# Altium PCB PortSwitcher1D.PCBDOC (part 2 of 4)
Units mil, origin at the board's own origin, x right, y up, seen from the top; angles counter-clockwise.
Board outline 6005.03 x 6005.03 mil, 4 copper layers (Top Layer, InternalPlane1, InternalPlane2, Bottom Layer); 153 components, 325 nets, 1175 pads, 173 vias.
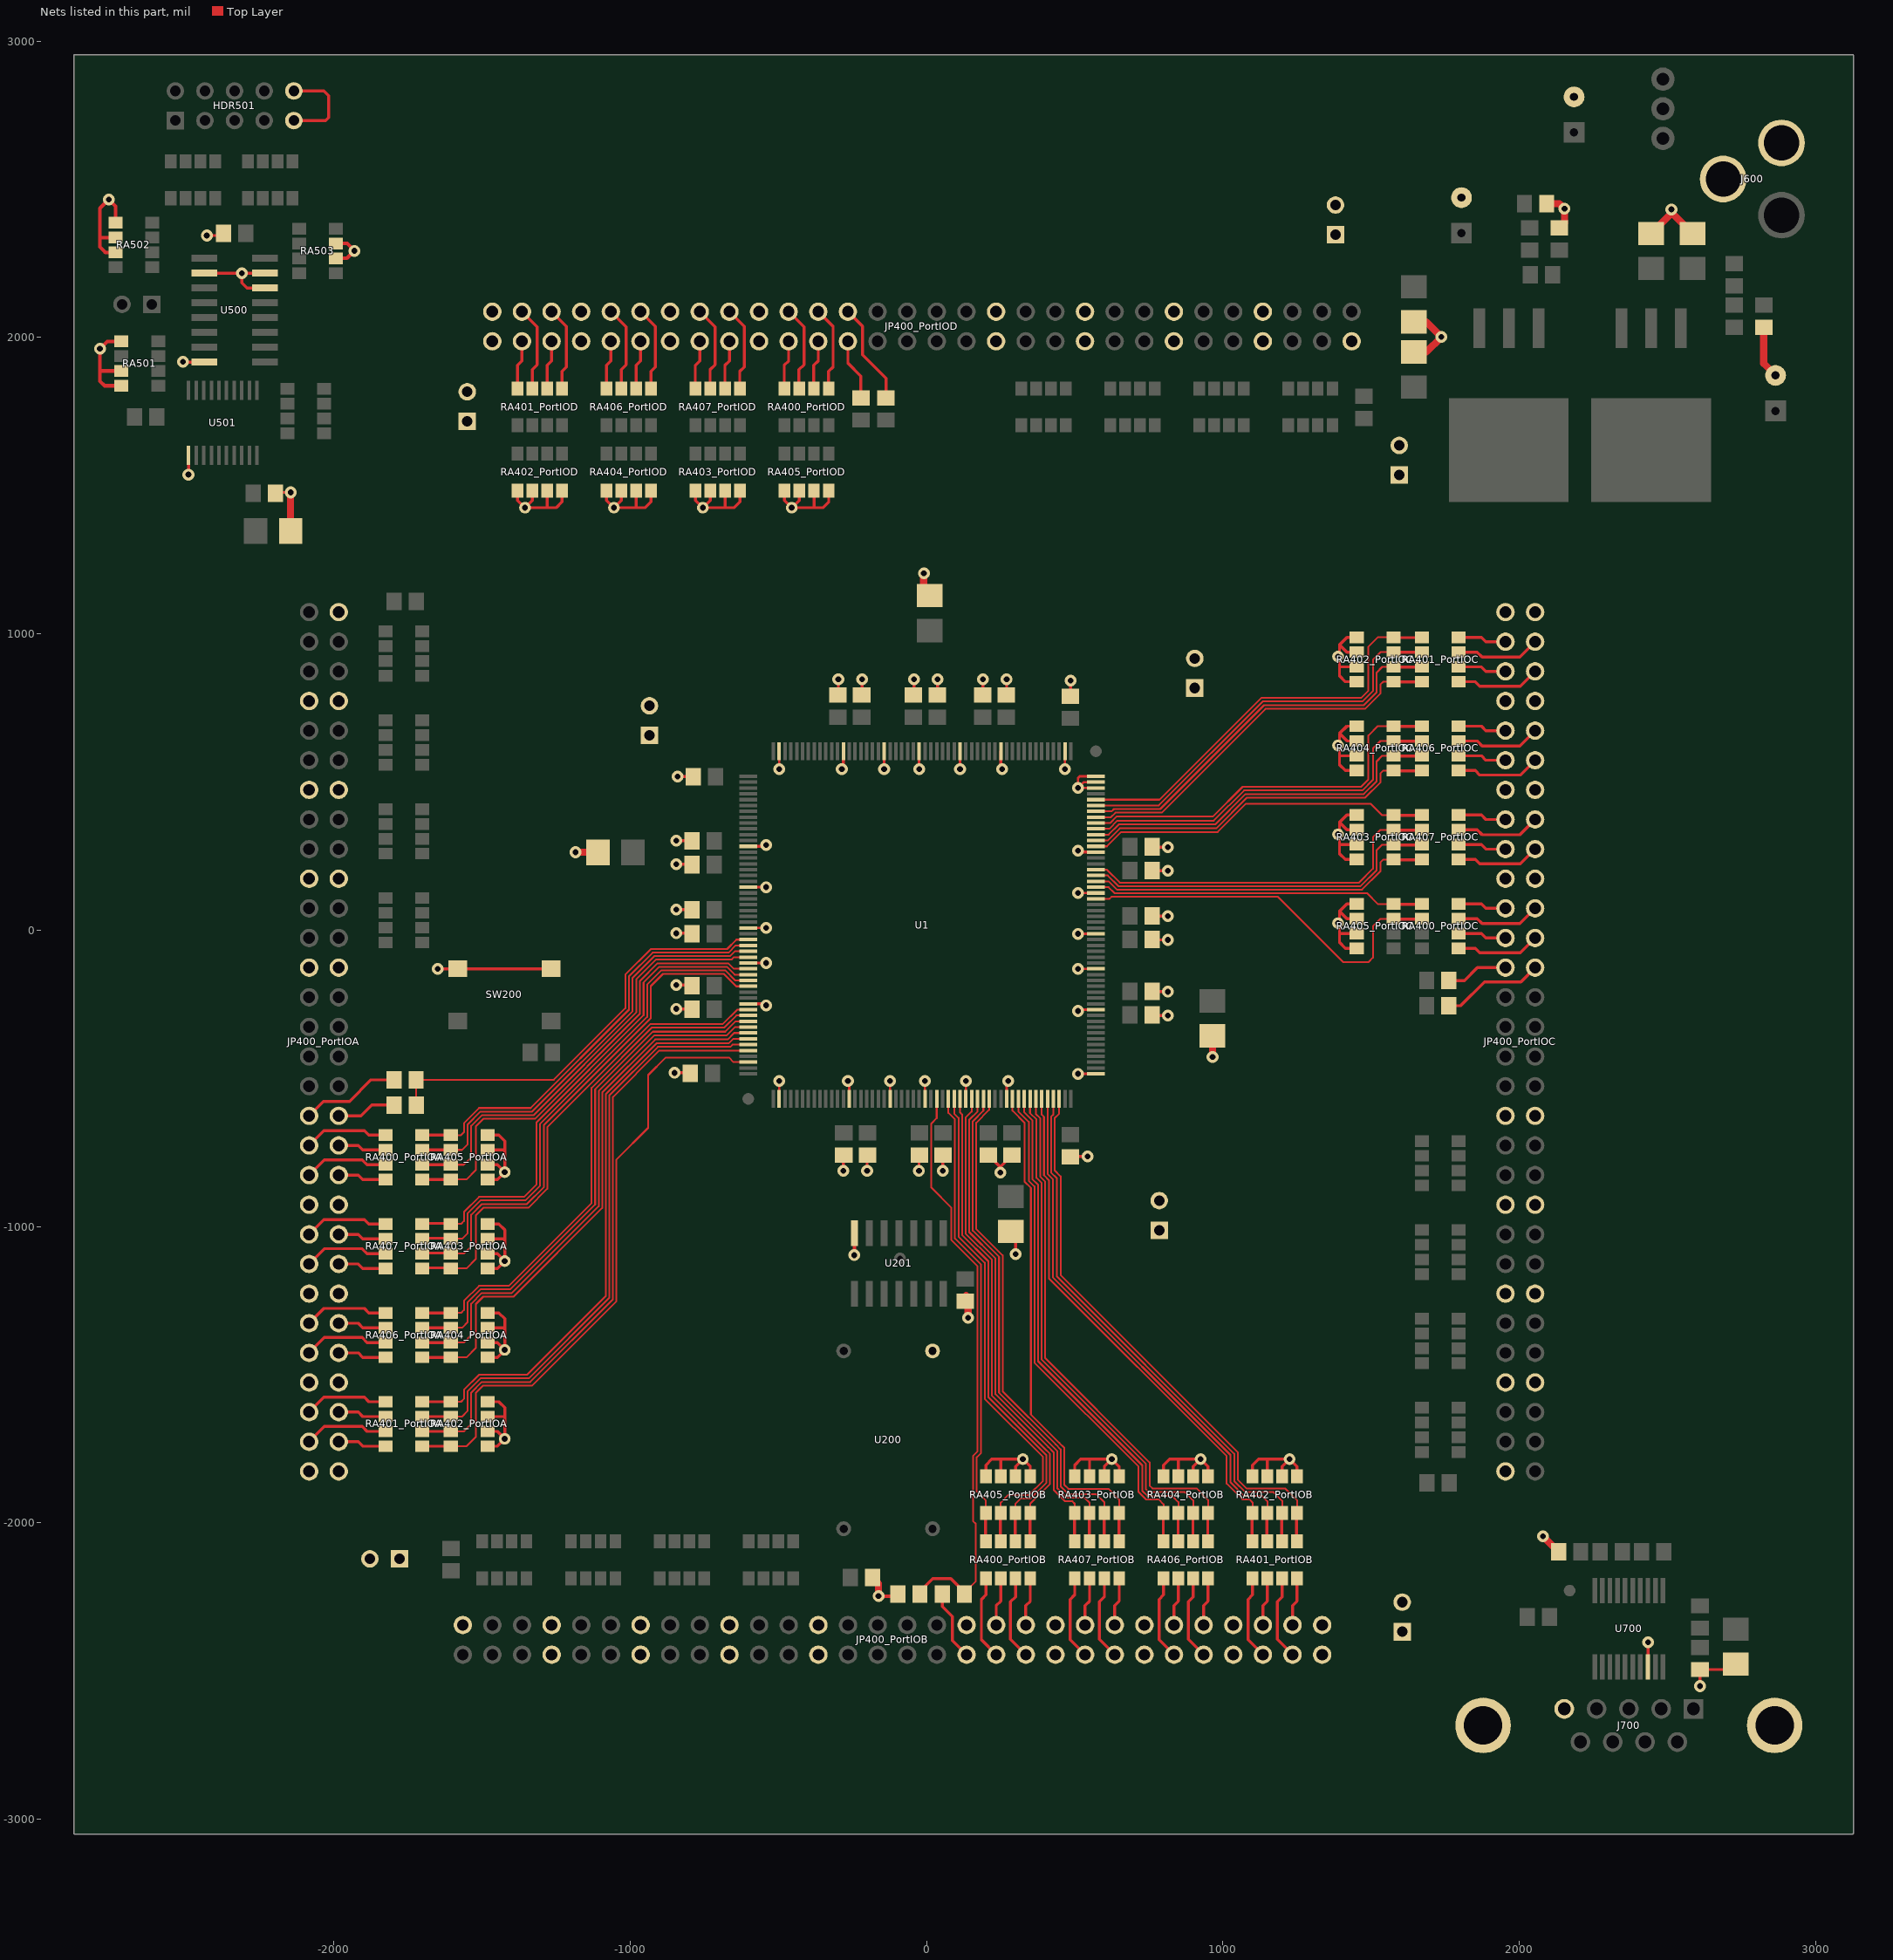
[diagram p4: the nets of this part, all layers, seen from the top]

## Via types
v1: diameter 40, hole 19.68, Top Layer to Bottom Layer, 173 vias

## Nets (pads, with @x,y where several pads share a name; then routed paths per layer and width w, separated by ;. In a path a pad name is that pad's centre, name@x,y a point inside that pad or via, vN(x,y) a via of type N, cw(c..) or ccw(c..) an arc to the next point about the centre after c; other vN are vias at no path point) (continued)
GND: C200.2 C201.2 C202.2 C203.2 C204.2 C205.2 C206.2 C207.2 C208.1 C209.1 C210.1 C211.1 C212.1 C213.1 C214.1 C215.1 C216.2 C217.2 C218.2 C219.2 C220.2 C221.2 C222.1 C223.1 C224.1 C225.1 C226.1 C227.1 C228.2 C229.2 C230.2 C231.2 C232.2 C233.2 C500.2 C501.2 C502.2 C600.2 C601.2 C602.2 C603.2 C604.2 C605.2 C606.2 C703.2 C704.2 C705.2 HDR501.9 HDR501.10 HDR600.1 HDR600.2 HDR601.1 HDR601.2 HDR602.1 HDR602.2 HDR603.1 HDR603.2 HDR604.1 HDR604.2 HDR605.1 HDR605.2 HDR606.1 HDR606.2 HDR607.1 HDR607.2 J600.2 J600.3 J700.5 J700.10 J700.11 JP400_PortIOA.1 JP400_PortIOA.2 JP400_PortIOA.7 JP400_PortIOA.8 JP400_PortIOA.13 JP400_PortIOA.14 JP400_PortIOA.19 JP400_PortIOA.20 JP400_PortIOA.26 JP400_PortIOA.35 JP400_PortIOA.36 JP400_PortIOA.41 JP400_PortIOA.42 JP400_PortIOA.47 JP400_PortIOA.48 JP400_PortIOA.53 JP400_PortIOA.54 JP400_PortIOA.60 JP400_PortIOB.1 JP400_PortIOB.2 JP400_PortIOB.7 JP400_PortIOB.8 JP400_PortIOB.13 JP400_PortIOB.14 JP400_PortIOB.19 JP400_PortIOB.20 JP400_PortIOB.26 JP400_PortIOB.35 JP400_PortIOB.36 JP400_PortIOB.41 JP400_PortIOB.42 JP400_PortIOB.47 JP400_PortIOB.48 JP400_PortIOB.53 JP400_PortIOB.54 JP400_PortIOB.60 JP400_PortIOC.1 JP400_PortIOC.2 JP400_PortIOC.7 JP400_PortIOC.8 JP400_PortIOC.13 JP400_PortIOC.14 JP400_PortIOC.19 JP400_PortIOC.20 JP400_PortIOC.26 JP400_PortIOC.35 JP400_PortIOC.36 JP400_PortIOC.41 JP400_PortIOC.42 JP400_PortIOC.47 JP400_PortIOC.48 JP400_PortIOC.53 JP400_PortIOC.54 JP400_PortIOC.60 JP400_PortIOD.1 JP400_PortIOD.2 JP400_PortIOD.7 JP400_PortIOD.8 JP400_PortIOD.13 JP400_PortIOD.14 JP400_PortIOD.19 JP400_PortIOD.20 JP400_PortIOD.26 JP400_PortIOD.35 JP400_PortIOD.36 JP400_PortIOD.41 JP400_PortIOD.42 JP400_PortIOD.47 JP400_PortIOD.48 JP400_PortIOD.53 JP400_PortIOD.54 JP400_PortIOD.60 pad.GND R401_PortIOA.1 R401_PortIOB.1 R401_PortIOC.1 R401_PortIOD.1 R603.1 R605.1 R606.1 RA402_PortIOA.1 RA402_PortIOA.2 RA402_PortIOA.3 RA402_PortIOA.4 RA402_PortIOB.1 RA402_PortIOB.2 RA402_PortIOB.3 RA402_PortIOB.4 RA402_PortIOC.1 RA402_PortIOC.2 RA402_PortIOC.3 RA402_PortIOC.4 RA402_PortIOD.1 RA402_PortIOD.2 RA402_PortIOD.3 RA402_PortIOD.4 RA403_PortIOA.1 RA403_PortIOA.2 RA403_PortIOA.3 RA403_PortIOA.4 RA403_PortIOB.1 RA403_PortIOB.2 RA403_PortIOB.3 RA403_PortIOB.4 RA403_PortIOC.1 RA403_PortIOC.2 RA403_PortIOC.3 RA403_PortIOC.4 RA403_PortIOD.1 RA403_PortIOD.2 RA403_PortIOD.3 RA403_PortIOD.4 RA404_PortIOA.1 RA404_PortIOA.2 RA404_PortIOA.3 RA404_PortIOA.4 RA404_PortIOB.1 RA404_PortIOB.2 RA404_PortIOB.3 RA404_PortIOB.4 RA404_PortIOC.1 RA404_PortIOC.2 RA404_PortIOC.3 RA404_PortIOC.4 RA404_PortIOD.1 RA404_PortIOD.2 RA404_PortIOD.3 RA404_PortIOD.4 RA405_PortIOA.1 RA405_PortIOA.2 RA405_PortIOA.3 RA405_PortIOA.4 RA405_PortIOB.1 RA405_PortIOB.2 RA405_PortIOB.3 RA405_PortIOB.4 RA405_PortIOC.1 RA405_PortIOC.2 RA405_PortIOC.3 RA405_PortIOC.4 RA405_PortIOD.1 RA405_PortIOD.2 RA405_PortIOD.3 RA405_PortIOD.4 RA501.5 RA501.7 RA501.8 RA502.5 RA502.6 RA502.7 RA503.6 RA503.7 SW200.3 SW200.4 U1.1 U1.12 U1.19 U1.25 U1.32 U1.39 U1.50 U1.51 U1.52 U1.54 U1.65 U1.72 U1.79 U1.85 U1.92 U1.103 U1.117 U1.124 U1.131 U1.137 U1.144 U1.158 U1.170 U1.177 U1.183 U1.190 U1.197 U200.7 U201.7 U500.2 U500.8 U500.14 U500.15 U501.11 U700.18 | length 20269.8
  Top Layer w8: v1(467.02,543.39) U1.54@467.02,603.91 ; 518.74,519.26 516.7,519.26 ; U1.50@571.35,479.89 v1(510.84,479.89) ; U1.51@571.35,499.58 530.52,499.58 ; U1.52@571.35,519.26 516.7,519.26 ; v1(510.84,479.89) 523.49,492.54 530.52,499.58 ; v1(510.84,479.89) 530.52,499.58 ; v1(510.84,479.89) 510.84,513.39 516.7,519.26 ; U1.137@-601.88,-110.66 v1(-541.37,-110.66) U1.137@-601.88,-110.66 ; U1.131@-601.88,7.45 v1(-541.37,7.45) U1.131@-601.88,7.45 ; U1.124@-601.88,145.24 v1(-541.37,145.24) U1.124@-601.88,145.24 ; U1.158@-497.55,-569.32 v1(-497.55,-508.81) U1.158@-497.55,-569.32 ; U1.103@-497.55,603.91 v1(-497.39,543.45) U1.103@-497.55,603.91 ; v1(-143.39,543.45) U1.85@-143.22,603.91 v1(-143.39,543.45) ; U1.177@-123.53,-569.32 v1(-123.53,-508.81) U1.177@-123.53,-569.32 ; v1(-25.39,543.45) U1.79@-25.11,603.91 v1(-25.39,543.45) ; U1.183@-5.42,-569.32 v1(-5.42,-508.81) U1.183@-5.42,-569.32 ; v1(112.69,543.39) U1.72@112.69,603.91 v1(112.69,543.39) ; U1.190@132.37,-569.32 v1(132.37,-508.81) U1.190@132.37,-569.32 ; v1(510.84,-484.68) U1.1@571.35,-484.68 v1(510.84,-484.68) ; v1(510.84,-130.35) U1.19@571.35,-130.35 v1(510.84,-130.35) ; v1(510.84,-12.24) U1.25@571.35,-12.24 v1(510.84,-12.24) ; v1(510.84,125.56) U1.32@571.35,125.56 v1(510.84,125.56)
  Top Layer w10: v1(-2509.7,1918.38) -2508.62,1917.29 U500.8@-2437.63,1917.29 ; v1(-2491.01,1537.57) -2490.42,1538.16 U501.11@-2490.42,1603.04 ; U500.2@-2437.63,2217.29 U500.15@-2232.9,2217.29 ; v1(-2429.02,2344.45) -2380.51,2344.45 C501.2@-2372.67,2352.29 ; v1(-2310.94,2217.29) -2310.94,2185.04 -2293.18,2167.29 U500.14@-2232.9,2167.29 ; C500.2@-2195.4,1477.55 v1(-2145.62,1477.55) ; HDR501.9@-2135.26,2732.29 -2028.38,2732.29 -2017.7,2742.97 -2017.7,2815.79 -2034.21,2832.29 HDR501.10@-2135.26,2832.29 ; JP400_PortIOA.26@-1983.77,-626.41 -1908.56,-626.41 -1872.15,-590 R401_PortIOA.1@-1797.4,-590 ; v1(-1649.69,-130.31) -1268.18,-130.31 SW200.3@-1267.39,-129.52 ; v1(-850.34,-481.44) C208.1@-798.93,-481.44 ; v1(-844.34,-265.44) C213.1@-792.93,-265.44 ; v1(-844.34,-185.44) C226.1@-792.93,-185.44 ; v1(-844.34,-10.44) C212.1@-792.93,-10.44 ; v1(-844.34,69.56) C225.1@-792.93,69.56 ; v1(-844.34,222.56) C221.2@-792.93,222.56 ; v1(-844.34,302.56) C207.2@-792.93,302.56 ; v1(-840.34,518.56) C204.2@-788.93,518.56 ; C201.2@-298,794.96 v1(-298,846.37) ; v1(-280.85,-811.79) C206.2@-280.85,-760.38 ; JP400_PortIOD.26@-265.66,1987.37 -265.66,1913.86 -222.07,1870.27 R401_PortIOD.1@-222.07,1796.53 ; C220.2@-218,794.96 v1(-218,846.37) ; v1(-200.85,-811.79) C218.2@-200.85,-760.38 ; C200.2@-43,794.96 v1(-43,846.37) ; v1(-25.85,-811.79) C211.1@-25.85,-760.38 ; C219.2@37,794.96 v1(37,846.37) ; v1(54.15,-811.79) C227.1@54.15,-760.38 ; C224.1@190,794.96 v1(190,846.37) ; C217.2@208.42,-759.11 v1@248.78,-799.46 ; v1(248.78,-817.53) 248.78,-798.76 C214.1@288.42,-759.11 ; C203.2@270,794.96 v1(270,846.37) ; C231.2@284.74,-1016.76 300.68,-1032.71 v1(300.68,-1092.94) ; C215.1@484.74,-765.11 486.63,-763.22 v1(542.81,-763.22) ; C202.2@486,790.96 v1(486,842.37) ; C205.2@762.41,-287.66 v1(813.82,-287.66) ; C216.2@762.41,-207.66 v1(813.82,-207.66) ; C210.1@762.41,-32.66 v1(813.82,-32.66) ; C222.1@762.41,47.34 v1(813.82,47.34) ; C223.1@762.41,200.34 v1(813.82,200.34) ; C209.1@762.41,280.34 v1(813.82,280.34) ; R401_PortIOC.1@1762.4,-170 1814.73,-170 1858.32,-126.41 JP400_PortIOC.26@1953.24,-126.41 ; U700.18@2434.9,-2485.46 v1(2434.9,-2403.35) ; v1@2609.74,-2550.64 C704.2@2609.74,-2495.11 2711.39,-2495.11 C705.2@2729.74,-2476.76 ; -1448.77,-1741.41 RA402_PortIOA.1@-1481.77,-1741.41 -1448.77,-1741.41 ; -1448.77,-1741.41 pad.GND@-1423.77,-1716.41 ; -1448.77,-1741.41 pad.GND@-1423.77,-1716.41 ; -1448.77,-1691.41 RA402_PortIOA.2@-1481.77,-1691.41 -1448.77,-1691.41 ; -1448.77,-1691.41 pad.GND@-1423.77,-1716.41 ; -1448.77,-1691.41 pad.GND@-1423.77,-1716.41 ; -1448.77,-1441.41 RA404_PortIOA.1@-1481.77,-1441.41 -1448.77,-1441.41 ; -1448.77,-1441.41 pad.GND@-1423.77,-1416.41 ; -1448.77,-1441.41 pad.GND@-1423.77,-1416.41 ; -1448.77,-1391.41 pad.GND@-1423.77,-1416.41 ; -1448.77,-1391.41 RA404_PortIOA.2@-1481.77,-1391.41 -1448.77,-1391.41 ; -1448.77,-1391.41 pad.GND@-1423.77,-1416.41 ; -1448.77,-1141.41 RA403_PortIOA.1@-1481.77,-1141.41 -1448.77,-1141.41 ; -1448.77,-1141.41 pad.GND@-1423.77,-1116.41 ; -1448.77,-1141.41 pad.GND@-1423.77,-1116.41 ; -1448.77,-1091.41 RA403_PortIOA.2@-1481.77,-1091.41 -1448.77,-1091.41 ; -1448.77,-1091.41 pad.GND@-1423.77,-1116.41 ; -1448.77,-1091.41 pad.GND@-1423.77,-1116.41 ; -1448.77,-841.41 RA405_PortIOA.1@-1481.77,-841.41 -1448.77,-841.41 ; -1448.77,-841.41 pad.GND@-1423.77,-816.41 ; -1448.77,-841.41 pad.GND@-1423.77,-816.41 ; -1448.77,-791.41 RA405_PortIOA.2@-1481.77,-791.41 -1448.77,-791.41 ; -1448.77,-791.41 pad.GND@-1423.77,-816.41 ; -1448.77,-791.41 pad.GND@-1423.77,-816.41 ; -1443.77,-1591.41 -1423.77,-1611.41 ; -1443.77,-1591.41 RA402_PortIOA.4@-1481.77,-1591.41 -1443.77,-1591.41 ; -1443.77,-1291.41 -1423.77,-1311.41 ; -1443.77,-1291.41 RA404_PortIOA.4@-1481.77,-1291.41 -1443.77,-1291.41 ; -1443.77,-991.41 -1423.77,-1011.41 ; -1443.77,-991.41 RA403_PortIOA.4@-1481.77,-991.41 -1443.77,-991.41 ; -1443.77,-691.41 -1423.77,-711.41 ; -1443.77,-691.41 RA405_PortIOA.4@-1481.77,-691.41 -1443.77,-691.41 ; pad.GND@-1423.77,-1716.41 -1423.77,-1641.41 ; pad.GND@-1423.77,-1716.41 -1423.77,-1641.41 ; -1423.77,-1641.41 RA402_PortIOA.3@-1481.77,-1641.41 -1423.77,-1641.41 ; -1423.77,-1641.41 -1423.77,-1611.41 ; -1423.77,-1641.41 -1423.77,-1611.41 ; pad.GND@-1423.77,-1416.41 -1423.77,-1341.41 ; pad.GND@-1423.77,-1416.41 -1423.77,-1341.41 ; -1423.77,-1341.41 -1423.77,-1311.41 ; -1423.77,-1341.41 RA404_PortIOA.3@-1481.77,-1341.41 -1423.77,-1341.41 ; -1423.77,-1341.41 -1423.77,-1311.41 ; pad.GND@-1423.77,-1116.41 -1423.77,-1041.41 ; pad.GND@-1423.77,-1116.41 -1423.77,-1041.41 ; -1423.77,-1041.41 RA403_PortIOA.3@-1481.77,-1041.41 -1423.77,-1041.41 ; -1423.77,-1041.41 -1423.77,-1011.41 ; -1423.77,-1041.41 -1423.77,-1011.41 ; pad.GND@-1423.77,-816.41 -1423.77,-741.41 ; pad.GND@-1423.77,-816.41 -1423.77,-741.41 ; -1423.77,-741.41 RA405_PortIOA.3@-1481.77,-741.41 -1423.77,-741.41 ; -1423.77,-741.41 -1423.77,-711.41 ; -1423.77,-741.41 -1423.77,-711.41 ; -1380.26,1450.8 pad.GND@-1355.26,1425.8 ; -1380.26,1450.8 RA402_PortIOD.1@-1380.26,1483.8 -1380.26,1450.8 ; -1380.26,1450.8 pad.GND@-1355.26,1425.8 ; pad.GND@-1355.26,1425.8 -1280.26,1425.8 ; pad.GND@-1355.26,1425.8 -1330.26,1450.8 ; pad.GND@-1355.26,1425.8 -1330.26,1450.8 ; pad.GND@-1355.26,1425.8 -1280.26,1425.8 ; -1330.26,1450.8 RA402_PortIOD.2@-1330.26,1483.8 -1330.26,1450.8 ; -1280.26,1425.8 -1250.26,1425.8 ; -1280.26,1425.8 RA402_PortIOD.3@-1280.26,1483.8 -1280.26,1425.8 ; -1280.26,1425.8 -1250.26,1425.8 ; -1250.26,1425.8 -1230.26,1445.8 ; -1230.26,1445.8 RA402_PortIOD.4@-1230.26,1483.8 -1230.26,1445.8 ; -1080.26,1450.8 RA404_PortIOD.1@-1080.26,1483.8 -1080.26,1450.8 ; -1080.26,1450.8 pad.GND@-1055.26,1425.8 ; -1080.26,1450.8 pad.GND@-1055.26,1425.8 ; pad.GND@-1055.26,1425.8 -980.26,1425.8 ; pad.GND@-1055.26,1425.8 -1030.26,1450.8 ; pad.GND@-1055.26,1425.8 -1030.26,1450.8 ; pad.GND@-1055.26,1425.8 -980.26,1425.8 ; -1030.26,1450.8 RA404_PortIOD.2@-1030.26,1483.8 -1030.26,1450.8 ; -980.26,1425.8 -950.26,1425.8 ; -980.26,1425.8 RA404_PortIOD.3@-980.26,1483.8 -980.26,1425.8 ; -980.26,1425.8 -950.26,1425.8 ; -950.26,1425.8 -930.26,1445.8 ; -930.26,1445.8 RA404_PortIOD.4@-930.26,1483.8 -930.26,1445.8 ; -780.26,1450.8 pad.GND@-755.26,1425.8 ; -780.26,1450.8 RA403_PortIOD.1@-780.26,1483.8 -780.26,1450.8 ; -780.26,1450.8 pad.GND@-755.26,1425.8 ; pad.GND@-755.26,1425.8 -680.26,1425.8 ; pad.GND@-755.26,1425.8 -730.26,1450.8 ; pad.GND@-755.26,1425.8 -730.26,1450.8 ; pad.GND@-755.26,1425.8 -680.26,1425.8 ; -730.26,1450.8 RA403_PortIOD.2@-730.26,1483.8 -730.26,1450.8 ; -680.26,1425.8 -650.26,1425.8 ; -680.26,1425.8 RA403_PortIOD.3@-680.26,1483.8 -680.26,1425.8 ; -680.26,1425.8 -650.26,1425.8 ; -650.26,1425.8 -630.26,1445.8 ; -630.26,1445.8 RA403_PortIOD.4@-630.26,1483.8 -630.26,1445.8 ; v1@-546.61,-248.46 U1.144@-601.88,-248.46 v1@-546.61,-248.46 ; v1@-546.61,-248.46 v1(-541.39,-253.68) v1@-546.61,-248.46 ; v1@-545.8,283.04 U1.117@-601.88,283.04 v1@-545.8,283.04 ; v1@-545.8,283.04 v1(-541.39,287.45) v1@-545.8,283.04 ; -480.26,1450.8 pad.GND@-455.26,1425.8 ; -480.26,1450.8 RA405_PortIOD.1@-480.26,1483.8 -480.26,1450.8 ; -480.26,1450.8 pad.GND@-455.26,1425.8 ; pad.GND@-455.26,1425.8 -380.26,1425.8 ; pad.GND@-455.26,1425.8 -430.26,1450.8 ; pad.GND@-455.26,1425.8 -430.26,1450.8 ; pad.GND@-455.26,1425.8 -380.26,1425.8 ; -430.26,1450.8 RA405_PortIOD.2@-430.26,1483.8 -430.26,1450.8 ; -380.26,1425.8 -350.26,1425.8 ; -380.26,1425.8 RA405_PortIOD.3@-380.26,1483.8 -380.26,1425.8 ; -380.26,1425.8 -350.26,1425.8 ; -350.26,1425.8 -330.26,1445.8 ; -330.26,1445.8 RA405_PortIOD.4@-330.26,1483.8 -330.26,1445.8 ; v1@-281.01,548.64 v1(-286.23,543.42) v1@-281.01,548.64 ; v1@-281.01,548.64 U1.92@-281.01,603.91 v1@-281.01,548.64 ; v1@-261.33,-513.24 v1(-265.74,-508.83) v1@-261.33,-513.24 ; v1@-261.33,-513.24 U1.170@-261.33,-569.32 v1@-261.33,-513.24 ; 199.74,-1804.91 219.74,-1784.91 ; 199.74,-1804.91 RA405_PortIOB.4@199.74,-1842.91 199.74,-1804.91 ; 219.74,-1784.91 249.74,-1784.91 ; 219.74,-1784.91 249.74,-1784.91 ; 249.74,-1784.91 pad.GND@324.74,-1784.91 ; 249.74,-1784.91 RA405_PortIOB.3@249.74,-1842.91 249.74,-1784.91 ; 249.74,-1784.91 pad.GND@324.74,-1784.91 ; v1@250.48,547.83 v1(254.89,543.42) v1@250.48,547.83 ; v1@250.48,547.83 U1.65@250.48,603.91 v1@250.48,547.83 ; v1@270.17,-514.05 U1.197@270.17,-569.32 v1@270.17,-514.05 ; v1@270.17,-514.05 v1(275.39,-508.83) v1@270.17,-514.05 ; 299.74,-1809.91 RA405_PortIOB.2@299.74,-1842.91 299.74,-1809.91 ; 299.74,-1809.91 pad.GND@324.74,-1784.91 ; 299.74,-1809.91 pad.GND@324.74,-1784.91 ; pad.GND@324.74,-1784.91 349.74,-1809.91 ; pad.GND@324.74,-1784.91 349.74,-1809.91 ; 349.74,-1809.91 RA405_PortIOB.1@349.74,-1842.91 349.74,-1809.91 ; 499.74,-1804.91 519.74,-1784.91 ; 499.74,-1804.91 RA403_PortIOB.4@499.74,-1842.91 499.74,-1804.91 ; v1@515.27,-268.14 v1(510.86,-272.55) v1@515.27,-268.14 ; v1@515.27,-268.14 U1.12@571.35,-268.14 v1@515.27,-268.14 ; v1@516.08,263.35 v1(510.86,268.57) v1@516.08,263.35 ; v1@516.08,263.35 U1.39@571.35,263.35 v1@516.08,263.35 ; 519.74,-1784.91 549.74,-1784.91 ; 519.74,-1784.91 549.74,-1784.91 ; 549.74,-1784.91 RA403_PortIOB.3@549.74,-1842.91 549.74,-1784.91 ; 549.74,-1784.91 pad.GND@624.74,-1784.91 ; 549.74,-1784.91 pad.GND@624.74,-1784.91 ; 599.74,-1809.91 RA403_PortIOB.2@599.74,-1842.91 599.74,-1809.91 ; 599.74,-1809.91 pad.GND@624.74,-1784.91 ; 599.74,-1809.91 pad.GND@624.74,-1784.91 ; pad.GND@624.74,-1784.91 649.74,-1809.91 ; pad.GND@624.74,-1784.91 649.74,-1809.91 ; 649.74,-1809.91 RA403_PortIOB.1@649.74,-1842.91 649.74,-1809.91 ; 799.74,-1804.91 819.74,-1784.91 ; 799.74,-1804.91 RA404_PortIOB.4@799.74,-1842.91 799.74,-1804.91 ; 819.74,-1784.91 849.74,-1784.91 ; 819.74,-1784.91 849.74,-1784.91 ; 849.74,-1784.91 RA404_PortIOB.3@849.74,-1842.91 849.74,-1784.91 ; 849.74,-1784.91 pad.GND@924.74,-1784.91 ; 849.74,-1784.91 pad.GND@924.74,-1784.91 ; 899.74,-1809.91 RA404_PortIOB.2@899.74,-1842.91 899.74,-1809.91 ; 899.74,-1809.91 pad.GND@924.74,-1784.91 ; 899.74,-1809.91 pad.GND@924.74,-1784.91 ; pad.GND@924.74,-1784.91 949.74,-1809.91 ; pad.GND@924.74,-1784.91 949.74,-1809.91 ; 949.74,-1809.91 RA404_PortIOB.1@949.74,-1842.91 949.74,-1809.91 ; 1099.74,-1804.91 1119.74,-1784.91 ; 1099.74,-1804.91 RA402_PortIOB.4@1099.74,-1842.91 1099.74,-1804.91 ; 1119.74,-1784.91 1149.74,-1784.91 ; 1119.74,-1784.91 1149.74,-1784.91 ; 1149.74,-1784.91 pad.GND@1224.74,-1784.91 ; 1149.74,-1784.91 RA402_PortIOB.3@1149.74,-1842.91 1149.74,-1784.91 ; 1149.74,-1784.91 pad.GND@1224.74,-1784.91 ; 1199.74,-1809.91 RA402_PortIOB.2@1199.74,-1842.91 1199.74,-1809.91 ; 1199.74,-1809.91 pad.GND@1224.74,-1784.91 ; 1199.74,-1809.91 pad.GND@1224.74,-1784.91 ; pad.GND@1224.74,-1784.91 1249.74,-1809.91 ; pad.GND@1224.74,-1784.91 1249.74,-1809.91 ; 1249.74,-1809.91 RA402_PortIOB.1@1249.74,-1842.91 1249.74,-1809.91 ; 1393.24,-41.41 1413.24,-61.41 ; 1393.24,-41.41 1393.24,-11.41 ; 1393.24,-41.41 pad.GND@1393.24,23.59 ; 1393.24,-41.41 1393.24,-11.41 ; 1393.24,-11.41 pad.GND@1393.24,23.59 ; 1393.24,-11.41 RA405_PortIOC.3@1451.24,-11.41 1393.24,-11.41 ; pad.GND@1393.24,23.59 1393.24,63.59 ; pad.GND@1393.24,23.59 1393.24,63.59 ; 1393.24,63.59 1418.24,38.59 ; 1393.24,63.59 1405.84,76.19 1418.24,88.59 ; 1393.24,258.59 1413.24,238.59 ; 1393.24,258.59 1393.24,288.59 ; 1393.24,258.59 pad.GND@1393.24,323.59 ; 1393.24,258.59 1393.24,288.59 ; 1393.24,288.59 pad.GND@1393.24,323.59 ; 1393.24,288.59 1431.94,288.59 RA403_PortIOC.3@1451.24,288.59 1393.24,288.59 ; pad.GND@1393.24,323.59 1393.24,327.29 1393.24,330.29 1393.24,363.59 ; pad.GND@1393.24,323.59 1393.24,363.59 ; 1393.24,363.59 1418.24,388.59 ; 1393.24,363.59 1418.24,338.59 ; 1393.24,558.59 1413.24,538.59 ; 1393.24,558.59 1393.24,588.59 ; 1393.24,558.59 pad.GND@1393.24,623.59 ; 1393.24,558.59 1393.24,588.59 ; 1393.24,588.59 1393.24,622.79 pad.GND@1393.24,623.59 ; 1393.24,588.59 1427.44,588.59 RA404_PortIOC.3@1451.24,588.59 1393.24,588.59 ; pad.GND@1393.24,623.59 1393.24,663.59 ; pad.GND@1393.24,623.59 1393.24,663.59 ; 1393.24,663.59 1418.24,688.59 ; 1393.24,663.59 1418.24,638.59 ; 1393.24,858.59 1413.24,838.59 ; 1393.24,858.59 1393.24,888.59 ; 1393.24,858.59 pad.GND@1393.24,923.59 ; 1393.24,858.59 1393.24,888.59 ; 1393.24,888.59 pad.GND@1393.24,923.59 ; 1393.24,888.59 RA402_PortIOC.3@1451.24,888.59 1393.24,888.59 ; pad.GND@1393.24,923.59 1393.24,963.59 ; pad.GND@1393.24,923.59 1393.24,963.59 ; 1393.24,963.59 1418.24,988.59 ; 1393.24,963.59 1418.24,938.59 ; 1413.24,-61.41 RA405_PortIOC.4@1451.24,-61.41 1413.24,-61.41 ; 1413.24,238.59 RA403_PortIOC.4@1451.24,238.59 1413.24,238.59 ; 1413.24,538.59 RA404_PortIOC.4@1451.24,538.59 1413.24,538.59 ; 1413.24,838.59 RA402_PortIOC.4@1451.24,838.59 1413.24,838.59 ; 1418.24,38.59 1443.44,38.59 RA405_PortIOC.2@1451.24,38.59 1418.24,38.59 ; 1418.24,88.59 RA405_PortIOC.1@1451.24,88.59 1418.24,88.59 ; 1418.24,338.59 RA403_PortIOC.2@1451.24,338.59 1418.24,338.59 ; 1418.24,388.59 1426.74,388.59 RA403_PortIOC.1@1451.24,388.59 1418.24,388.59 ; 1418.24,638.59 RA404_PortIOC.2@1451.24,638.59 1418.24,638.59 ; 1418.24,688.59 RA404_PortIOC.1@1451.24,688.59 1418.24,688.59 ; 1418.24,938.59 RA402_PortIOC.2@1451.24,938.59 1418.24,938.59 ; 1418.24,988.59 RA402_PortIOC.1@1451.24,988.59 1418.24,988.59
  Top Layer w12: -2789.35,2337.29 RA502.6@-2737.26,2337.29 ; -2788.64,1887.29 RA501.7@-2717.26,1887.29 ; RA502.7@-2737.26,2287.29 -2771.42,2287.29 -2789.64,2305.51 -2789.64,2436.38 v1(-2760.12,2465.9) -2737.26,2443.05 RA502.5@-2737.26,2387.29 ; RA501.8@-2717.26,1837.29 -2774.06,1837.29 -2789.64,1852.87 v1(-2789.64,1962.1) -2764.44,1987.29 RA501.5@-2717.26,1987.29 ; RA503.6@-1993.26,2267.29 -1956.04,2267.29 v1(-1930.61,2292.72) -1955.18,2317.29 RA503.7@-1993.26,2317.29 ; v1@-244,-1096.06 U201.7@-244,-1022.08 ; v1(-162.36,-2247.46) -104.86,-2247.46 R401_PortIOB.1@-97.4,-2240
  Top Layer w24: C502.2@-2146.21,1347.29 -2146.21,1476.96 v1(-2145.62,1477.55) ; v1(-1185.24,263.29) C228.2@-1110.32,263.29 ; C232.2@-182.6,-2185 -162.36,-2205.24 v1(-162.36,-2247.46) ; C230.2@-10.26,1131.35 -10.26,1203.09 v1(-9.36,1204) ; C233.2@130,-1252.4 139.73,-1262.13 v1(139.73,-1307.74) ; C233.2@133.12,-1233.14 C233.2@143.2,-1243.22 ; C229.2@964.74,-356.76 964.8,-356.83 v1(964.8,-427.48) ; C603.2@1644.74,1951.35 1686.57,1951.35 v1(1737.24,2002.02) 1686.02,2053.24 C600.2@1644.74,2053.24 ; v1(2080.18,-2045.74) 2080.36,-2045.74 C703.2@2132.33,-2097.71 ; R606.1@2092.14,2452.29 2135.18,2452.29 v1(2152.49,2434.98) 2152.49,2387.45 R605.1@2134.74,2369.69 ; C602.2@2444.74,2351.35 2513.14,2419.75 v1(2513.14,2432.45) ; v1@2513.14,2422.95 C601.2@2584.74,2351.35 ; R603.1@2824.74,2034.89 2824.74,1912.29 C604.2@2864.74,1872.29
  other v1: 2610.05,-2550.95 -244.54,-1096.6
I0_PortIOA: JP400_PortIOA.4 RA401_PortIOA.4 | length 164.2
  Top Layer w10: JP400_PortIOA.4@-1983.77,-1726.41 -1918.02,-1726.41 -1903.02,-1741.41 RA401_PortIOA.4@-1825.77,-1741.41
I0_PortIOB: JP400_PortIOB.4 RA401_PortIOB.4 | length 164.2
  Top Layer w10: JP400_PortIOB.4@1234.74,-2344.91 1234.74,-2279.17 1249.74,-2264.17 RA401_PortIOB.4@1249.74,-2186.91
I0_PortIOC: JP400_PortIOC.4 RA401_PortIOC.4 | length 164.2
  Top Layer w10: RA401_PortIOC.4@1795.24,988.59 1872.49,988.59 1887.49,973.59 JP400_PortIOC.4@1953.24,973.59
I0_PortIOD: JP400_PortIOD.4 RA401_PortIOD.4 | length 164.2
  Top Layer w10: RA401_PortIOD.4@-1380.66,1829.37 -1380.66,1906.62 -1365.66,1921.62 JP400_PortIOD.4@-1365.66,1987.37
I1_PortIOA: JP400_PortIOA.3 RA401_PortIOA.3 | length 286.2
  Top Layer w10: JP400_PortIOA.3@-2083.77,-1726.41 -2032.19,-1674.83 -1905.03,-1674.83 -1888.45,-1691.41 RA401_PortIOA.3@-1825.77,-1691.41
I1_PortIOB: JP400_PortIOB.3 RA401_PortIOB.3 | length 286.2
  Top Layer w10: RA401_PortIOB.3@1199.74,-2186.91 1199.74,-2249.6 1183.16,-2266.17 1183.16,-2393.34 JP400_PortIOB.3@1234.74,-2444.91
I1_PortIOC: JP400_PortIOC.3 RA401_PortIOC.3 | length 286.2
  Top Layer w10: RA401_PortIOC.3@1795.24,938.59 1857.93,938.59 1874.5,922.02 2001.66,922.02 JP400_PortIOC.3@2053.24,973.59
I1_PortIOD: JP400_PortIOD.3 RA401_PortIOD.3 | length 286.2
  Top Layer w10: JP400_PortIOD.3@-1365.66,2087.37 -1314.08,2035.8 -1314.08,1908.63 -1330.66,1892.06 RA401_PortIOD.3@-1330.66,1829.37
I2_PortIOA: JP400_PortIOA.6 RA401_PortIOA.2 | length 164.2
  Top Layer w10: JP400_PortIOA.6@-1983.77,-1626.41 -1918.02,-1626.41 -1903.02,-1641.41 RA401_PortIOA.2@-1825.77,-1641.41
I2_PortIOB: JP400_PortIOB.6 RA401_PortIOB.2 | length 164.2
  Top Layer w10: JP400_PortIOB.6@1134.74,-2344.91 1134.74,-2279.17 1149.74,-2264.17 RA401_PortIOB.2@1149.74,-2186.91
I2_PortIOC: JP400_PortIOC.6 RA401_PortIOC.2 | length 164.2
  Top Layer w10: RA401_PortIOC.2@1795.24,888.59 1872.49,888.59 1887.49,873.59 JP400_PortIOC.6@1953.24,873.59
I2_PortIOD: JP400_PortIOD.6 RA401_PortIOD.2 | length 164.2
  Top Layer w10: RA401_PortIOD.2@-1280.66,1829.37 -1280.66,1906.62 -1265.66,1921.62 JP400_PortIOD.6@-1265.66,1987.37
I3_PortIOA: JP400_PortIOA.5 RA401_PortIOA.1 | length 284.9
  Top Layer w10: JP400_PortIOA.5@-2083.77,-1626.41 -2033.77,-1576.41 -1897.16,-1576.41 -1882.16,-1591.41 RA401_PortIOA.1@-1825.77,-1591.41
I3_PortIOB: JP400_PortIOB.5 RA401_PortIOB.1 | length 284.9
  Top Layer w10: RA401_PortIOB.1@1099.74,-2186.91 1099.74,-2243.3 1084.74,-2258.3 1084.74,-2394.91 JP400_PortIOB.5@1134.74,-2444.91
I3_PortIOC: JP400_PortIOC.5 RA401_PortIOC.1 | length 284.9
  Top Layer w10: RA401_PortIOC.1@1795.24,838.59 1851.63,838.59 1866.63,823.59 2003.24,823.59 JP400_PortIOC.5@2053.24,873.59
I3_PortIOD: JP400_PortIOD.5 RA401_PortIOD.1 | length 284.9
  Top Layer w10: JP400_PortIOD.5@-1265.66,2087.37 -1215.66,2037.37 -1215.66,1900.76 -1230.66,1885.76 RA401_PortIOD.1@-1230.66,1829.37
I4_PortIOA: JP400_PortIOA.10 RA406_PortIOA.4 | length 164.2
  Top Layer w10: JP400_PortIOA.10@-1983.77,-1426.41 -1918.02,-1426.41 -1903.02,-1441.41 RA406_PortIOA.4@-1825.77,-1441.41
I4_PortIOB: JP400_PortIOB.10 RA406_PortIOB.4 | length 164.2
  Top Layer w10: JP400_PortIOB.10@934.74,-2344.91 934.74,-2279.17 949.74,-2264.17 RA406_PortIOB.4@949.74,-2186.91
I4_PortIOC: JP400_PortIOC.10 RA406_PortIOC.4 | length 164.2
  Top Layer w10: RA406_PortIOC.4@1795.24,688.59 1872.49,688.59 1887.49,673.59 JP400_PortIOC.10@1953.24,673.59
I4_PortIOD: JP400_PortIOD.10 RA406_PortIOD.4 | length 164.2
  Top Layer w10: RA406_PortIOD.4@-1080.66,1829.37 -1080.66,1906.62 -1065.66,1921.62 JP400_PortIOD.10@-1065.66,1987.37
I5_PortIOA: JP400_PortIOA.9 RA406_PortIOA.3 | length 286.2
  Top Layer w10: JP400_PortIOA.9@-2083.77,-1426.41 -2032.19,-1374.83 -1905.03,-1374.83 -1888.45,-1391.41 RA406_PortIOA.3@-1825.77,-1391.41
I5_PortIOB: JP400_PortIOB.9 RA406_PortIOB.3 | length 286.2
  Top Layer w10: RA406_PortIOB.3@899.74,-2186.91 899.74,-2249.6 883.16,-2266.17 883.16,-2393.34 JP400_PortIOB.9@934.74,-2444.91
I5_PortIOC: JP400_PortIOC.9 RA406_PortIOC.3 | length 286.2
  Top Layer w10: RA406_PortIOC.3@1795.24,638.59 1857.93,638.59 1874.5,622.02 2001.66,622.02 JP400_PortIOC.9@2053.24,673.59
I5_PortIOD: JP400_PortIOD.9 RA406_PortIOD.3 | length 286.2
  Top Layer w10: JP400_PortIOD.9@-1065.66,2087.37 -1014.08,2035.8 -1014.08,1908.63 -1030.66,1892.06 RA406_PortIOD.3@-1030.66,1829.37
I6_PortIOA: JP400_PortIOA.12 RA406_PortIOA.2 | length 164.2
  Top Layer w10: JP400_PortIOA.12@-1983.77,-1326.41 -1918.02,-1326.41 -1903.02,-1341.41 RA406_PortIOA.2@-1825.77,-1341.41
I6_PortIOB: JP400_PortIOB.12 RA406_PortIOB.2 | length 164.2
  Top Layer w10: JP400_PortIOB.12@834.74,-2344.91 834.74,-2279.17 849.74,-2264.17 RA406_PortIOB.2@849.74,-2186.91
I6_PortIOC: JP400_PortIOC.12 RA406_PortIOC.2 | length 164.2
  Top Layer w10: RA406_PortIOC.2@1795.24,588.59 1872.49,588.59 1887.49,573.59 JP400_PortIOC.12@1953.24,573.59
I6_PortIOD: JP400_PortIOD.12 RA406_PortIOD.2 | length 164.2
  Top Layer w10: RA406_PortIOD.2@-980.66,1829.37 -980.66,1906.62 -965.66,1921.62 JP400_PortIOD.12@-965.66,1987.37
I7_PortIOA: JP400_PortIOA.11 RA406_PortIOA.1 | length 284.9
  Top Layer w10: JP400_PortIOA.11@-2083.77,-1326.41 -2033.77,-1276.41 -1897.16,-1276.41 -1882.16,-1291.41 RA406_PortIOA.1@-1825.77,-1291.41
I7_PortIOB: JP400_PortIOB.11 RA406_PortIOB.1 | length 284.9
  Top Layer w10: RA406_PortIOB.1@799.74,-2186.91 799.74,-2243.3 784.74,-2258.3 784.74,-2394.91 JP400_PortIOB.11@834.74,-2444.91
I7_PortIOC: JP400_PortIOC.11 RA406_PortIOC.1 | length 284.9
  Top Layer w10: RA406_PortIOC.1@1795.24,538.59 1851.63,538.59 1866.63,523.59 2003.24,523.59 JP400_PortIOC.11@2053.24,573.59
I7_PortIOD: JP400_PortIOD.11 RA406_PortIOD.1 | length 284.9
  Top Layer w10: JP400_PortIOD.11@-965.66,2087.37 -915.66,2037.37 -915.66,1900.76 -930.66,1885.76 RA406_PortIOD.1@-930.66,1829.37
I8_PortIOA: JP400_PortIOA.16 RA407_PortIOA.4 | length 164.2
  Top Layer w10: JP400_PortIOA.16@-1983.77,-1126.41 -1918.02,-1126.41 -1903.02,-1141.41 RA407_PortIOA.4@-1825.77,-1141.41
I8_PortIOB: JP400_PortIOB.16 RA407_PortIOB.4 | length 164.2
  Top Layer w10: JP400_PortIOB.16@634.74,-2344.91 634.74,-2279.17 649.74,-2264.17 RA407_PortIOB.4@649.74,-2186.91
I8_PortIOC: JP400_PortIOC.16 RA407_PortIOC.4 | length 164.2
  Top Layer w10: RA407_PortIOC.4@1795.24,388.59 1872.49,388.59 1887.49,373.59 JP400_PortIOC.16@1953.24,373.59
I8_PortIOD: JP400_PortIOD.16 RA407_PortIOD.4 | length 164.2
  Top Layer w10: RA407_PortIOD.4@-780.66,1829.37 -780.66,1906.62 -765.66,1921.62 JP400_PortIOD.16@-765.66,1987.37
I9_PortIOA: JP400_PortIOA.15 RA407_PortIOA.3 | length 286.2
  Top Layer w10: JP400_PortIOA.15@-2083.77,-1126.41 -2032.19,-1074.83 -1905.03,-1074.83 -1888.45,-1091.41 RA407_PortIOA.3@-1825.77,-1091.41
I9_PortIOB: JP400_PortIOB.15 RA407_PortIOB.3 | length 286.2
  Top Layer w10: RA407_PortIOB.3@599.74,-2186.91 599.74,-2249.6 583.16,-2266.17 583.16,-2393.34 JP400_PortIOB.15@634.74,-2444.91
I9_PortIOC: JP400_PortIOC.15 RA407_PortIOC.3 | length 286.2
  Top Layer w10: RA407_PortIOC.3@1795.24,338.59 1857.93,338.59 1874.5,322.02 2001.66,322.02 JP400_PortIOC.15@2053.24,373.59
I9_PortIOD: JP400_PortIOD.15 RA407_PortIOD.3 | length 286.2
  Top Layer w10: JP400_PortIOD.15@-765.66,2087.37 -714.08,2035.8 -714.08,1908.63 -730.66,1892.06 RA407_PortIOD.3@-730.66,1829.37
I10_PortIOA: JP400_PortIOA.18 RA407_PortIOA.2 | length 164.2
  Top Layer w10: JP400_PortIOA.18@-1983.77,-1026.41 -1918.02,-1026.41 -1903.02,-1041.41 RA407_PortIOA.2@-1825.77,-1041.41
I10_PortIOB: JP400_PortIOB.18 RA407_PortIOB.2 | length 164.2
  Top Layer w10: JP400_PortIOB.18@534.74,-2344.91 534.74,-2279.17 549.74,-2264.17 RA407_PortIOB.2@549.74,-2186.91
I10_PortIOC: JP400_PortIOC.18 RA407_PortIOC.2 | length 164.2
  Top Layer w10: RA407_PortIOC.2@1795.24,288.59 1872.49,288.59 1887.49,273.59 JP400_PortIOC.18@1953.24,273.59
I10_PortIOD: JP400_PortIOD.18 RA407_PortIOD.2 | length 164.2
  Top Layer w10: RA407_PortIOD.2@-680.66,1829.37 -680.66,1906.62 -665.66,1921.62 JP400_PortIOD.18@-665.66,1987.37
I11_PortIOA: JP400_PortIOA.17 RA407_PortIOA.1 | length 284.9
  Top Layer w10: JP400_PortIOA.17@-2083.77,-1026.41 -2033.77,-976.41 -1897.16,-976.41 -1882.16,-991.41 RA407_PortIOA.1@-1825.77,-991.41
I11_PortIOB: JP400_PortIOB.17 RA407_PortIOB.1 | length 284.9
  Top Layer w10: RA407_PortIOB.1@499.74,-2186.91 499.74,-2243.3 484.74,-2258.3 484.74,-2394.91 JP400_PortIOB.17@534.74,-2444.91
I11_PortIOC: JP400_PortIOC.17 RA407_PortIOC.1 | length 284.9
  Top Layer w10: RA407_PortIOC.1@1795.24,238.59 1851.63,238.59 1866.63,223.59 2003.24,223.59 JP400_PortIOC.17@2053.24,273.59
I11_PortIOD: JP400_PortIOD.17 RA407_PortIOD.1 | length 284.9
  Top Layer w10: JP400_PortIOD.17@-665.66,2087.37 -615.66,2037.37 -615.66,1900.76 -630.66,1885.76 RA407_PortIOD.1@-630.66,1829.37
I12_PortIOA: JP400_PortIOA.22 RA400_PortIOA.4 | length 164.2
  Top Layer w10: JP400_PortIOA.22@-1983.77,-826.41 -1918.02,-826.41 -1903.02,-841.41 RA400_PortIOA.4@-1825.77,-841.41
I12_PortIOB: JP400_PortIOB.22 RA400_PortIOB.4 | length 164.2
  Top Layer w10: JP400_PortIOB.22@334.74,-2344.91 334.74,-2279.17 349.74,-2264.17 RA400_PortIOB.4@349.74,-2186.91
I12_PortIOC: JP400_PortIOC.22 RA400_PortIOC.4 | length 164.2
  Top Layer w10: RA400_PortIOC.4@1795.24,88.59 1872.49,88.59 1887.49,73.59 JP400_PortIOC.22@1953.24,73.59
I12_PortIOD: JP400_PortIOD.22 RA400_PortIOD.4 | length 164.2
  Top Layer w10: RA400_PortIOD.4@-480.66,1829.37 -480.66,1906.62 -465.66,1921.62 JP400_PortIOD.22@-465.66,1987.37
I13_PortIOA: JP400_PortIOA.21 RA400_PortIOA.3 | length 286.2
  Top Layer w10: JP400_PortIOA.21@-2083.77,-826.41 -2032.19,-774.83 -1905.03,-774.83 -1888.45,-791.41 RA400_PortIOA.3@-1825.77,-791.41
I13_PortIOB: JP400_PortIOB.21 RA400_PortIOB.3 | length 286.2
  Top Layer w10: RA400_PortIOB.3@299.74,-2186.91 299.74,-2249.6 283.16,-2266.17 283.16,-2393.34 JP400_PortIOB.21@334.74,-2444.91
I13_PortIOC: JP400_PortIOC.21 RA400_PortIOC.3 | length 286.2
  Top Layer w10: RA400_PortIOC.3@1795.24,38.59 1857.93,38.59 1874.5,22.02 2001.66,22.02 JP400_PortIOC.21@2053.24,73.59
I13_PortIOD: JP400_PortIOD.21 RA400_PortIOD.3 | length 286.2
  Top Layer w10: JP400_PortIOD.21@-465.66,2087.37 -414.08,2035.8 -414.08,1908.63 -430.66,1892.06 RA400_PortIOD.3@-430.66,1829.37
I14_PortIOA: JP400_PortIOA.24 RA400_PortIOA.2 | length 164.2
  Top Layer w10: JP400_PortIOA.24@-1983.77,-726.41 -1918.02,-726.41 -1903.02,-741.41 RA400_PortIOA.2@-1825.77,-741.41
I14_PortIOB: JP400_PortIOB.24 RA400_PortIOB.2 | length 164.2
  Top Layer w10: JP400_PortIOB.24@234.74,-2344.91 234.74,-2279.17 249.74,-2264.17 RA400_PortIOB.2@249.74,-2186.91
I14_PortIOC: JP400_PortIOC.24 RA400_PortIOC.2 | length 164.2
  Top Layer w10: RA400_PortIOC.2@1795.24,-11.41 1872.49,-11.41 1887.49,-26.41 JP400_PortIOC.24@1953.24,-26.41
I14_PortIOD: JP400_PortIOD.24 RA400_PortIOD.2 | length 164.2
  Top Layer w10: RA400_PortIOD.2@-380.66,1829.37 -380.66,1906.62 -365.66,1921.62 JP400_PortIOD.24@-365.66,1987.37
I15_PortIOA: JP400_PortIOA.23 RA400_PortIOA.1 | length 284.9
  Top Layer w10: JP400_PortIOA.23@-2083.77,-726.41 -2033.77,-676.41 -1897.16,-676.41 -1882.16,-691.41 RA400_PortIOA.1@-1825.77,-691.41
I15_PortIOB: JP400_PortIOB.23 RA400_PortIOB.1 | length 284.9
  Top Layer w10: RA400_PortIOB.1@199.74,-2186.91 199.74,-2243.3 184.74,-2258.3 184.74,-2394.91 JP400_PortIOB.23@234.74,-2444.91
I15_PortIOC: JP400_PortIOC.23 RA400_PortIOC.1 | length 284.9
  Top Layer w10: RA400_PortIOC.1@1795.24,-61.41 1851.63,-61.41 1866.63,-76.41 2003.24,-76.41 JP400_PortIOC.23@2053.24,-26.41
I15_PortIOD: JP400_PortIOD.23 RA400_PortIOD.1 | length 284.9
  Top Layer w10: JP400_PortIOD.23@-365.66,2087.37 -315.66,2037.37 -315.66,1900.76 -330.66,1885.76 RA400_PortIOD.1@-330.66,1829.37
I16_PortIOA: JP400_PortIOA.25 R402_PortIOA.2 | length 336.7
  Top Layer w10: JP400_PortIOA.25@-2083.77,-626.41 -2034.97,-577.61 -1947.34,-577.61 -1874.73,-505 R402_PortIOA.2@-1797.4,-505
I16_PortIOB: JP400_PortIOB.25 R402_PortIOB.2 | length 238.9
  Top Layer w10: R402_PortIOB.2@52.6,-2240 52.6,-2282.34 86.59,-2316.34 86.59,-2396.77 JP400_PortIOB.25@134.74,-2444.91
I16_PortIOC: JP400_PortIOC.25 R402_PortIOC.2 | length 344.1
  Top Layer w10: R402_PortIOC.2@1762.4,-255 1801.56,-255 1882.39,-174.17 2005.48,-174.17 JP400_PortIOC.25@2053.24,-126.41
I16_PortIOD: JP400_PortIOD.25 R402_PortIOD.2 | length 344.1
  Top Layer w10: JP400_PortIOD.25@-265.66,2087.37 -216.48,2038.19 -216.48,1941.43 -137.07,1862.02 R402_PortIOD.2@-137.07,1796.53
INA0: RA401_PortIOA.5 RA402_PortIOA.8 U1.154 | length 2120.5
  Top Layer w6: RA402_PortIOA.8@-1605.77,-1741.41 -1552.9,-1741.41 -1521.17,-1709.68 -1521.17,-1561.77 -1496.04,-1536.64 -1331.06,-1536.64 -1046.61,-1252.18 -1046.61,-774.04 -939.72,-667.15 -939.72,-489.05 -880.61,-429.94 -667.03,-429.94 -651.66,-445.31 U1.154@-601.88,-445.31
  Top Layer w10: RA401_PortIOA.5@-1701.77,-1741.41 RA402_PortIOA.8@-1605.77,-1741.41
INA1: RA401_PortIOA.6 RA402_PortIOA.7 U1.152 | length 2094.3
  Top Layer w6: RA402_PortIOA.7@-1605.77,-1691.41 -1561.96,-1691.41 -1536.73,-1666.18 -1536.73,-1560.36 -1501.01,-1524.64 -1337.76,-1524.64 -1058.61,-1245.49 -1058.61,-562.68 -901.87,-405.94 U1.152@-601.88,-405.94
  Top Layer w10: RA401_PortIOA.6@-1701.77,-1691.41 RA402_PortIOA.7@-1605.77,-1691.41
INA2: RA401_PortIOA.7 RA402_PortIOA.6 U1.151 | length 2058.4
  Top Layer w6: RA402_PortIOA.6@-1605.77,-1641.41 -1568.06,-1641.41 -1548.73,-1622.08 -1548.73,-1555.39 -1505.37,-1512.03 -1342.87,-1512.03 -1070.61,-1239.77 -1070.61,-557.71 -906.84,-393.94 -662.78,-393.94 -655.09,-386.25 U1.151@-601.88,-386.25
  Top Layer w10: RA401_PortIOA.7@-1701.77,-1641.41 RA402_PortIOA.6@-1605.77,-1641.41
INA3: RA401_PortIOA.8 RA402_PortIOA.5 U1.150 | length 2024.2
  Top Layer w6: RA402_PortIOA.5@-1605.77,-1591.41 -1571.21,-1591.41 -1561.52,-1581.72 -1561.52,-1551.21 -1510.34,-1500.03 -1348.58,-1500.03 -1082.61,-1234.06 -1082.61,-552.74 -911.81,-381.94 -667.78,-381.94 -652.41,-366.57 U1.150@-601.88,-366.57
  Top Layer w10: RA401_PortIOA.8@-1701.77,-1591.41 RA402_PortIOA.5@-1605.77,-1591.41
INA4: RA404_PortIOA.8 RA406_PortIOA.5 U1.149 | length 1868
  Top Layer w6: RA404_PortIOA.8@-1605.77,-1441.41 -1552.9,-1441.41 -1521.17,-1409.68 -1521.17,-1261.77 -1496.04,-1236.64 -1394.16,-1236.64 -1094.61,-937.09 -1094.61,-547.77 -915.39,-368.55 -671.39,-368.55 -649.72,-346.88 U1.149@-601.88,-346.88
  Top Layer w10: RA406_PortIOA.5@-1701.77,-1441.41 RA404_PortIOA.8@-1605.77,-1441.41
INA5: RA404_PortIOA.7 RA406_PortIOA.6 U1.148 | length 1830.3
  Top Layer w6: RA404_PortIOA.7@-1605.77,-1391.41 -1561.96,-1391.41 -1536.73,-1366.18 -1536.73,-1260.36 -1501.01,-1224.64 -1399.87,-1224.64 -1106.61,-931.37 -1106.61,-542.8 -918.36,-354.55 -674.39,-354.55 -647.04,-327.2 U1.148@-601.88,-327.2
  Top Layer w10: RA406_PortIOA.6@-1701.77,-1391.41 RA404_PortIOA.7@-1605.77,-1391.41
INA6: RA404_PortIOA.6 RA406_PortIOA.7 U1.147 | length 1794.8
  Top Layer w6: RA404_PortIOA.6@-1605.77,-1341.41 -1568.06,-1341.41 -1548.73,-1322.08 -1548.73,-1255.39 -1505.37,-1212.03 -1405.02,-1212.03 -1118.61,-925.62 -1118.61,-537.08 -924.08,-342.55 -679.39,-342.55 -644.35,-307.51 U1.147@-601.88,-307.51
  Top Layer w10: RA406_PortIOA.7@-1701.77,-1341.41 RA404_PortIOA.6@-1605.77,-1341.41
INA7: RA404_PortIOA.5 RA406_PortIOA.8 U1.146 | length 1761.1
  Top Layer w6: RA404_PortIOA.5@-1605.77,-1291.41 -1571.21,-1291.41 -1561.52,-1281.72 -1561.52,-1251.21 -1510.34,-1200.03 -1409.99,-1200.03 -1130.61,-920.65 -1130.61,-532.11 -927.05,-328.55 -682.39,-328.55 -641.67,-287.83 U1.146@-601.88,-287.83
  Top Layer w10: RA406_PortIOA.8@-1701.77,-1291.41 RA404_PortIOA.5@-1605.77,-1291.41
INA8: RA403_PortIOA.8 RA407_PortIOA.5 U1.145 | length 1670
  Top Layer w6: RA403_PortIOA.8@-1605.77,-1141.41 -1552.9,-1141.41 -1521.17,-1109.68 -1521.17,-961.77 -1496.04,-936.64 -1344.19,-936.64 -1280.11,-872.56 -1280.11,-664.64 -932.02,-316.55 -687.39,-316.55 -638.98,-268.14 U1.145@-601.88,-268.14
  Top Layer w10: RA407_PortIOA.5@-1703.23,-1139.48 RA403_PortIOA.8@-1607.23,-1139.48
INA9: RA403_PortIOA.7 RA407_PortIOA.6 U1.141 | length 1756.2
  Top Layer w6: RA403_PortIOA.7@-1605.77,-1091.41 -1561.96,-1091.41 -1536.73,-1066.18 -1536.73,-960.36 -1501.01,-924.64 -1349.16,-924.64 -1292.11,-867.59 -1292.11,-658.33 -930.81,-297.03 -930.81,-188.79 -889.57,-147.55 -684.39,-147.55 -642.54,-189.4 U1.141@-601.88,-189.4
  Top Layer w10: RA407_PortIOA.6@-1703.23,-1089.48 RA403_PortIOA.7@-1607.23,-1089.48
INA10: RA403_PortIOA.6 RA407_PortIOA.7 U1.140 | length 1714.7
  Top Layer w6: RA403_PortIOA.6@-1605.77,-1041.41 -1568.06,-1041.41 -1548.73,-1022.08 -1548.73,-955.39 -1505.37,-912.03 -1353.53,-912.03 -1304.11,-862.61 -1304.11,-653.36 -943.18,-292.43 -943.18,-183.44 -895.28,-135.55 -679.42,-135.55 -645.25,-169.72 U1.140@-601.88,-169.72
  Top Layer w10: RA407_PortIOA.7@-1703.23,-1039.48 RA403_PortIOA.6@-1607.23,-1039.48
INA11: RA403_PortIOA.5 RA407_PortIOA.8 U1.139 | length 1675.6
  Top Layer w6: RA403_PortIOA.5@-1605.77,-991.41 -1571.21,-991.41 -1561.52,-981.72 -1561.52,-951.21 -1510.34,-900.03 -1358.5,-900.03 -1316.11,-857.64 -1316.11,-647.89 -955.18,-286.96 -955.18,-176.75 -901.98,-123.55 -674.45,-123.55 -647.97,-150.03 U1.139@-601.88,-150.03
  Top Layer w10: RA407_PortIOA.8@-1703.23,-989.48 RA403_PortIOA.5@-1607.23,-989.48
INA12: RA400_PortIOA.5 RA405_PortIOA.8 U1.138 | length 1561.6
  Top Layer w6: RA405_PortIOA.8@-1605.77,-841.41 -1552.9,-841.41 -1521.17,-809.68 -1521.17,-661.77 -1496.04,-636.64 -1321.83,-636.64 -967.78,-282.59 -967.78,-171.64 -907.69,-111.55 -669.48,-111.55 -650.68,-130.35 U1.138@-601.88,-130.35
  Top Layer w10: RA400_PortIOA.5@-1701.77,-841.41 RA405_PortIOA.8@-1605.77,-841.41
INA13: RA400_PortIOA.6 RA405_PortIOA.7 U1.136 | length 1517.4
  Top Layer w6: RA405_PortIOA.7@-1605.77,-791.41 -1561.96,-791.41 -1536.73,-766.18 -1536.73,-660.36 -1501.01,-624.64 -1326.8,-624.64 -979.78,-277.62 -979.78,-165.92 -913.4,-99.55 -658.51,-99.55 -649.93,-90.98 U1.136@-601.88,-90.98
  Top Layer w10: RA400_PortIOA.6@-1701.77,-791.41 RA405_PortIOA.7@-1605.77,-791.41
INA14: RA400_PortIOA.7 RA405_PortIOA.6 U1.135 | length 1482.4
  Top Layer w6: RA405_PortIOA.6@-1605.77,-741.41 -1568.06,-741.41 -1548.73,-722.08 -1548.73,-655.39 -1505.37,-612.03 -1331.16,-612.03 -992.38,-273.24 -992.38,-160.81 -919.11,-87.55 -663.48,-87.55 -647.22,-71.29 U1.135@-601.88,-71.29
  Top Layer w10: RA400_PortIOA.7@-1701.77,-741.41 RA405_PortIOA.6@-1605.77,-741.41
INA15: RA400_PortIOA.8 RA405_PortIOA.5 U1.134 | length 1449.1
  Top Layer w6: RA405_PortIOA.5@-1605.77,-691.41 -1571.21,-691.41 -1561.52,-681.72 -1561.52,-651.21 -1510.34,-600.03 -1336.13,-600.03 -1004.38,-268.27 -1004.38,-155.1 -924.83,-75.55 -668.45,-75.55 -644.5,-51.61 U1.134@-601.88,-51.61
  Top Layer w10: RA400_PortIOA.8@-1701.77,-691.41 RA405_PortIOA.5@-1605.77,-691.41
INA16: R401_PortIOA.2 R402_PortIOA.1 U1.133 | length 1468.4
  Top Layer w6: R401_PortIOA.2@-1722.6,-590 R402_PortIOA.1@-1722.6,-505 -1258.07,-505 -1016.47,-263.4 -1016.47,-149.57 -930.45,-63.55 -673.42,-63.55 -641.79,-31.92 U1.133@-601.88,-31.92
INB0: RA401_PortIOB.5 RA402_PortIOB.8 U1.206 | length 1915
  Top Layer w6: U1.206@447.33,-569.32 447.33,-619.11 431.96,-634.48 431.96,-810.46 452.26,-830.76 452.26,-1164.08 483.1,-1194.92 1050.68,-1762.51 1050.68,-1855.02 1080.36,-1884.7 1210.55,-1884.7 1249.74,-1923.89 RA402_PortIOB.8@1249.74,-1966.91
  Top Layer w10: RA401_PortIOB.5@1248.59,-2061.77 RA402_PortIOB.8@1248.59,-1965.77
INB1: RA401_PortIOB.6 RA402_PortIOB.7 U1.205 | length 1875.4
  Top Layer w6: U1.205@427.65,-569.32 427.65,-621.82 419.96,-629.51 419.96,-817.35 439.46,-836.85 439.46,-1168.25 1037.89,-1766.68 1037.89,-1859.2 1075.39,-1896.7 1170.38,-1896.7 1199.74,-1926.05 RA402_PortIOB.7@1199.74,-1966.91
  Top Layer w10: RA401_PortIOB.6@1198.59,-2061.77 RA402_PortIOB.7@1198.59,-1965.77
INB2: RA401_PortIOB.7 RA402_PortIOB.6 U1.204 | length 1836.4
  Top Layer w6: U1.204@407.96,-569.32 407.96,-822.32 426.66,-841.03 426.66,-1172.43 1025.09,-1770.86 1025.09,-1863.38 1070.42,-1908.7 1131.2,-1908.7 1149.74,-1927.24 RA402_PortIOB.6@1149.74,-1966.91
  Top Layer w10: RA401_PortIOB.7@1148.59,-2061.77 RA402_PortIOB.6@1148.59,-1965.77
INB3: RA401_PortIOB.8 RA402_PortIOB.5 U1.203 | length 1802.1
  Top Layer w6: U1.203@388.28,-569.32 388.28,-622.54 395.96,-630.22 395.96,-827.3 412.89,-844.22 412.89,-1175.62 1012.29,-1775.03 1012.29,-1867.55 1065.44,-1920.7 1089.07,-1920.7 1099.74,-1931.37 RA402_PortIOB.5@1099.74,-1966.91
  Top Layer w10: RA401_PortIOB.8@1098.59,-2061.77 RA402_PortIOB.5@1098.59,-1965.77
INB4: RA404_PortIOB.8 RA406_PortIOB.5 U1.202 | length 1821.4
  Top Layer w6: U1.202@368.59,-569.32 368.59,-619.85 383.96,-635.22 383.96,-832.27 400.09,-848.39 400.09,-1444.08 752.45,-1796.45 752.45,-1874.44 762.11,-1884.09 910.73,-1884.09 949.74,-1923.1 RA404_PortIOB.8@949.74,-1966.91
  Top Layer w10: RA406_PortIOB.5@948.59,-2061.77 RA404_PortIOB.8@948.59,-1965.77
INB5: RA404_PortIOB.7 RA406_PortIOB.6 U1.201 | length 1793.5
  Top Layer w6: U1.201@348.91,-569.32 348.91,-617.17 370.58,-638.83 370.58,-836.07 388.09,-853.58 388.09,-1449.05 739.85,-1800.81 739.85,-1886.95 748.99,-1896.09 871.55,-1896.09 899.74,-1924.28 RA404_PortIOB.7@899.74,-1966.91
  Top Layer w10: RA406_PortIOB.6@898.59,-2061.77 RA404_PortIOB.7@898.59,-1965.77
INB6: RA404_PortIOB.6 RA406_PortIOB.7 U1.200 | length 1758.1
  Top Layer w6: U1.200@329.22,-569.32 329.22,-614.48 356.58,-641.83 356.58,-839.79 376.09,-859.3 376.09,-1454.53 727.85,-1806.29 727.85,-1891.92 744.63,-1908.7 828.05,-1908.7 849.74,-1930.38 RA404_PortIOB.6@849.74,-1966.91
  Top Layer w10: RA406_PortIOB.7@848.59,-2061.77 RA404_PortIOB.6@848.59,-1965.77
INB7: RA404_PortIOB.5 RA406_PortIOB.8 U1.199 | length 1722
  Top Layer w6: U1.199@309.54,-569.32 309.54,-611.8 344.58,-646.83 344.58,-845.5 364.09,-865.02 364.09,-1459.5 715.05,-1810.46 715.05,-1896.09 739.66,-1920.7 782.96,-1920.7 799.74,-1937.47 RA404_PortIOB.5@799.74,-1966.91
  Top Layer w10: RA406_PortIOB.8@798.59,-2061.77 RA404_PortIOB.5@798.59,-1965.77
INB8: RA403_PortIOB.8 RA407_PortIOB.5 U1.198 | length 1722
  Top Layer w6: U1.198@289.85,-569.32 289.85,-609.11 330.58,-649.83 330.58,-848.47 351.86,-869.76 351.86,-1634.55 447.52,-1730.21 464.45,-1747.14 464.45,-1871.49 478.22,-1885.27 613.67,-1885.27 649.74,-1921.33 RA403_PortIOB.8@649.74,-1966.91
  Top Layer w10: RA407_PortIOB.5@648.59,-2061.77 RA403_PortIOB.8@648.59,-1965.77
INB9: RA403_PortIOB.7 RA407_PortIOB.6 U1.194 | length 1745.5
  Top Layer w6: U1.194@211.11,-569.32 211.11,-606.43 167.58,-649.96 167.58,-1008.85 256.35,-1097.62 256.35,-1556.01 435.52,-1735.18 452.45,-1752.11 452.45,-1876.83 479.21,-1903.59 572.94,-1903.59 599.74,-1930.38 RA403_PortIOB.7@599.74,-1966.91
  Top Layer w10: RA407_PortIOB.6@598.59,-2061.77 RA403_PortIOB.7@598.59,-1965.77
INB10: RA403_PortIOB.6 RA407_PortIOB.7 U1.193 | length 1706.5
  Top Layer w6: U1.193@191.43,-569.32 191.43,-609.11 155.58,-644.96 155.58,-1013.82 244.35,-1102.59 244.35,-1560.98 422.73,-1739.36 440.45,-1757.08 440.45,-1882.73 473.3,-1915.59 532.78,-1915.59 549.74,-1932.55 RA403_PortIOB.6@549.74,-1966.91
  Top Layer w10: RA407_PortIOB.7@548.59,-2061.77 RA403_PortIOB.6@548.59,-1965.77
INB11: RA403_PortIOB.5 RA407_PortIOB.8 U1.192 | length 1667
  Top Layer w6: U1.192@171.74,-569.32 171.74,-611.8 143.58,-639.96 143.58,-1018.79 232.35,-1107.56 232.35,-1565.95 410.12,-1743.72 428.45,-1762.05 428.45,-1888.64 467.4,-1927.59 491.63,-1927.59 499.74,-1935.7 RA403_PortIOB.5@499.74,-1966.91
  Top Layer w10: RA407_PortIOB.8@498.59,-2061.77 RA403_PortIOB.5@498.59,-1965.77
INB12: RA400_PortIOB.5 RA405_PortIOB.8 U1.191 | length 1647.7
  Top Layer w6: U1.191@152.06,-569.32 152.06,-612.35 131.58,-632.83 131.58,-1023.76 220.35,-1112.53 220.35,-1571.43 398.12,-1749.2 416.45,-1767.53 416.45,-1868.82 349.74,-1935.53 RA405_PortIOB.8@349.74,-1966.91
  Top Layer w10: RA400_PortIOB.5@348.59,-2061.77 RA405_PortIOB.8@348.59,-1965.77
INB13: RA400_PortIOB.6 RA405_PortIOB.7 U1.189 | length 1677.2
  Top Layer w6: U1.189@112.69,-569.32 112.69,-614.94 119.58,-621.83 119.58,-1028.73 208.35,-1117.5 208.35,-1576.4 385.33,-1753.38 404.45,-1772.5 404.45,-1863.84 349.56,-1918.73 316.47,-1918.73 299.74,-1935.46 RA405_PortIOB.7@299.74,-1966.91
  Top Layer w10: RA400_PortIOB.6@298.59,-2061.77 RA405_PortIOB.7@298.59,-1965.77
INB14: RA400_PortIOB.7 RA405_PortIOB.6 U1.188 | length 1717.6
  Top Layer w6: U1.188@93,-569.32 93.01,-619.11 107.58,-633.68 107.58,-1033.7 196.35,-1122.47 196.35,-1581.37 392.45,-1777.47 392.45,-1858.87 345.31,-1906.01 275.49,-1906.01 249.74,-1931.76 RA405_PortIOB.6@249.74,-1966.91
  Top Layer w10: RA400_PortIOB.7@248.59,-2061.77 RA405_PortIOB.6@248.59,-1965.77
INB15: RA400_PortIOB.8 RA405_PortIOB.5 U1.187 | length 1559.6
  Top Layer w6: U1.187@73.32,-569.32 73.32,-616.39 95.58,-638.65 95.58,-1040.4 183.81,-1128.64 183.81,-1763.94 169.25,-1778.51 169.25,-1894.2 199.74,-1924.69 RA405_PortIOB.5@199.74,-1966.91 RA405_PortIOB.5@198.59,-1965.77
  Top Layer w10: RA400_PortIOB.8@198.59,-2061.77 RA405_PortIOB.5@198.59,-1965.77
INB16: R401_PortIOB.2 R402_PortIOB.1 U1.185 | length 1964.6
  Top Layer w6: U1.185@33.95,-569.32 33.95,-634.19 15.74,-652.39 15.74,-868.74 83.58,-936.58 83.58,-1045.93 171.81,-1134.17 171.81,-1758.97 156.46,-1774.33 156.46,-1993.58 166.3,-2003.42 166.3,-2197.27 127.4,-2236.17 R402_PortIOB.1@127.4,-2240
  Top Layer w10: R401_PortIOB.2@-22.6,-2240 -22.6,-2231.68 20.66,-2188.42 81.67,-2188.42 R402_PortIOB.1@127.4,-2234.15
INC0: RA401_PortIOC.5 RA402_PortIOC.8 U1.48 | length 1413.6
  Top Layer w6: U1.48@571.35,440.52 785.92,440.52 1129.22,783.82 1465.51,783.82 1490.64,808.95 1490.64,956.86 1522.37,988.59 RA402_PortIOC.8@1575.24,988.59
  Top Layer w10: RA402_PortIOC.8@1575.24,987.45 RA401_PortIOC.5@1671.24,987.45
INC1: RA401_PortIOC.6 RA402_PortIOC.7 U1.47 | length 1376.3
  Top Layer w6: U1.47@571.35,420.84 783.2,420.84 1134.19,771.82 1470.48,771.82 1506.2,807.54 1506.2,913.36 1531.43,938.59 RA402_PortIOC.7@1575.24,938.59
  Top Layer w10: RA402_PortIOC.7@1575.24,937.45 RA401_PortIOC.6@1671.24,937.45
INC2: RA401_PortIOC.7 RA402_PortIOC.6 U1.46 | length 1340.9
  Top Layer w6: U1.46@571.35,401.15 624.56,401.15 632.25,408.83 788.17,408.83 1138.55,759.21 1474.84,759.21 1518.2,802.57 1518.2,869.26 1537.53,888.59 RA402_PortIOC.6@1575.24,888.59
  Top Layer w10: RA402_PortIOC.6@1575.24,887.45 RA401_PortIOC.7@1671.24,887.45
INC3: RA401_PortIOC.8 RA402_PortIOC.5 U1.45 | length 1307.1
  Top Layer w6: U1.45@571.35,381.47 621.88,381.46 637.25,396.83 793.14,396.83 1143.52,747.21 1479.81,747.21 1531,798.39 1531,828.91 1540.68,838.59 RA402_PortIOC.5@1575.24,838.59
  Top Layer w10: RA402_PortIOC.5@1575.24,837.45 RA401_PortIOC.8@1671.24,837.45
INC4: RA404_PortIOC.8 RA406_PortIOC.5 U1.44 | length 1321.9
  Top Layer w6: U1.44@571.35,361.78 619.19,361.78 640.86,383.45 966.05,383.45 1066.42,483.82 1465.51,483.82 1490.64,508.95 1490.64,656.86 1522.37,688.59 RA404_PortIOC.8@1575.24,688.59
  Top Layer w10: RA404_PortIOC.8@1574.1,687.45 RA406_PortIOC.5@1670.1,687.45
INC5: RA404_PortIOC.7 RA406_PortIOC.6 U1.43 | length 1284.7
  Top Layer w6: U1.43@571.35,342.1 616.51,342.09 643.86,369.45 969.02,369.45 1071.39,471.82 1470.48,471.82 1506.2,507.54 1506.2,613.36 1531.43,638.59 RA404_PortIOC.7@1575.24,638.59
  Top Layer w10: RA404_PortIOC.7@1574.1,637.45 RA406_PortIOC.6@1670.1,637.45
INC6: RA404_PortIOC.6 RA406_PortIOC.7 U1.42 | length 1249.2
  Top Layer w6: U1.42@571.35,322.41 613.82,322.41 648.86,357.45 973.99,357.45 1075.76,459.21 1474.84,459.21 1518.2,502.57 1518.2,569.26 1537.53,588.59 RA404_PortIOC.6@1575.24,588.59
  Top Layer w10: RA404_PortIOC.6@1574.1,587.45 RA406_PortIOC.7@1670.1,587.45
INC7: RA404_PortIOC.5 RA406_PortIOC.8 U1.41 | length 1215.5
  Top Layer w6: U1.41@571.35,302.73 611.14,302.72 651.86,343.45 976.96,343.45 1080.73,447.21 1479.81,447.21 1531,498.39 1531,528.91 1540.68,538.59 RA404_PortIOC.5@1575.24,538.59
  Top Layer w10: RA404_PortIOC.5@1574.1,537.45 RA406_PortIOC.8@1670.1,537.45
INC8: RA403_PortIOC.8 RA407_PortIOC.5 U1.40 | length 1175.2
  Top Layer w6: U1.40@571.35,283.04 608.45,283.04 656.86,331.45 981.93,331.45 1077.22,426.74 1497.77,426.74 1535.92,388.59 RA403_PortIOC.8@1575.24,388.59
  Top Layer w10: RA403_PortIOC.8@1574.1,387.45 RA407_PortIOC.5@1670.1,387.45
INC9: RA403_PortIOC.7 RA407_PortIOC.6 U1.36 | length 1253.6
  Top Layer w6: U1.36@571.35,204.3 608.45,204.3 651.99,160.77 1459.43,160.77 1506.2,207.54 1506.2,313.36 1531.43,338.59 RA403_PortIOC.7@1575.24,338.59
  Top Layer w10: RA403_PortIOC.7@1574.1,337.45 RA407_PortIOC.6@1670.1,337.45
INC10: RA403_PortIOC.6 RA407_PortIOC.7 U1.35 | length 1211.7
  Top Layer w6: U1.35@571.35,184.61 611.14,184.61 646.99,148.77 1464.4,148.77 1518.2,202.57 1518.2,269.26 1537.53,288.59 RA403_PortIOC.6@1575.24,288.59
  Top Layer w10: RA403_PortIOC.6@1574.1,287.45 RA407_PortIOC.7@1670.1,287.45
INC11: RA403_PortIOC.5 RA407_PortIOC.8 U1.34 | length 1171.6
  Top Layer w6: U1.34@571.35,164.93 613.82,164.93 641.99,136.77 1469.37,136.77 1531,198.39 1531,228.91 1540.68,238.59 RA403_PortIOC.5@1575.24,238.59
  Top Layer w10: RA403_PortIOC.5@1574.1,237.45 RA407_PortIOC.8@1670.1,237.45
INC12: RA400_PortIOC.5 RA405_PortIOC.8 U1.33 | length 1123.4
  Top Layer w6: U1.33@571.35,145.24 614.38,145.25 634.86,124.77 1486.2,124.77 1522.37,88.59 RA405_PortIOC.8@1575.24,88.59
  Top Layer w10: RA405_PortIOC.8@1574.1,87.45 RA400_PortIOC.5@1670.1,87.45
INC13: RA400_PortIOC.6 RA405_PortIOC.7 U1.31 | length 1316.7
  Top Layer w6: U1.31@571.35,105.87 616.97,105.88 623.86,112.77 1185.52,112.77 1406,-107.71 1490.95,-107.71 1506.2,-92.46 1506.2,13.36 1531.43,38.59 RA405_PortIOC.7@1575.24,38.59
  Top Layer w10: RA405_PortIOC.7@1574.1,37.45 RA400_PortIOC.6@1670.1,37.45